# Altium PCB PCB.PcbDoc
Units mm, origin at the board's own origin, x right, y up, seen from the top; angles counter-clockwise.
Board outline 76.73 x 81.4 mm, 2 copper layers (Top Layer, Bottom Layer); 76 components, 50 nets, 285 pads, 249 vias.
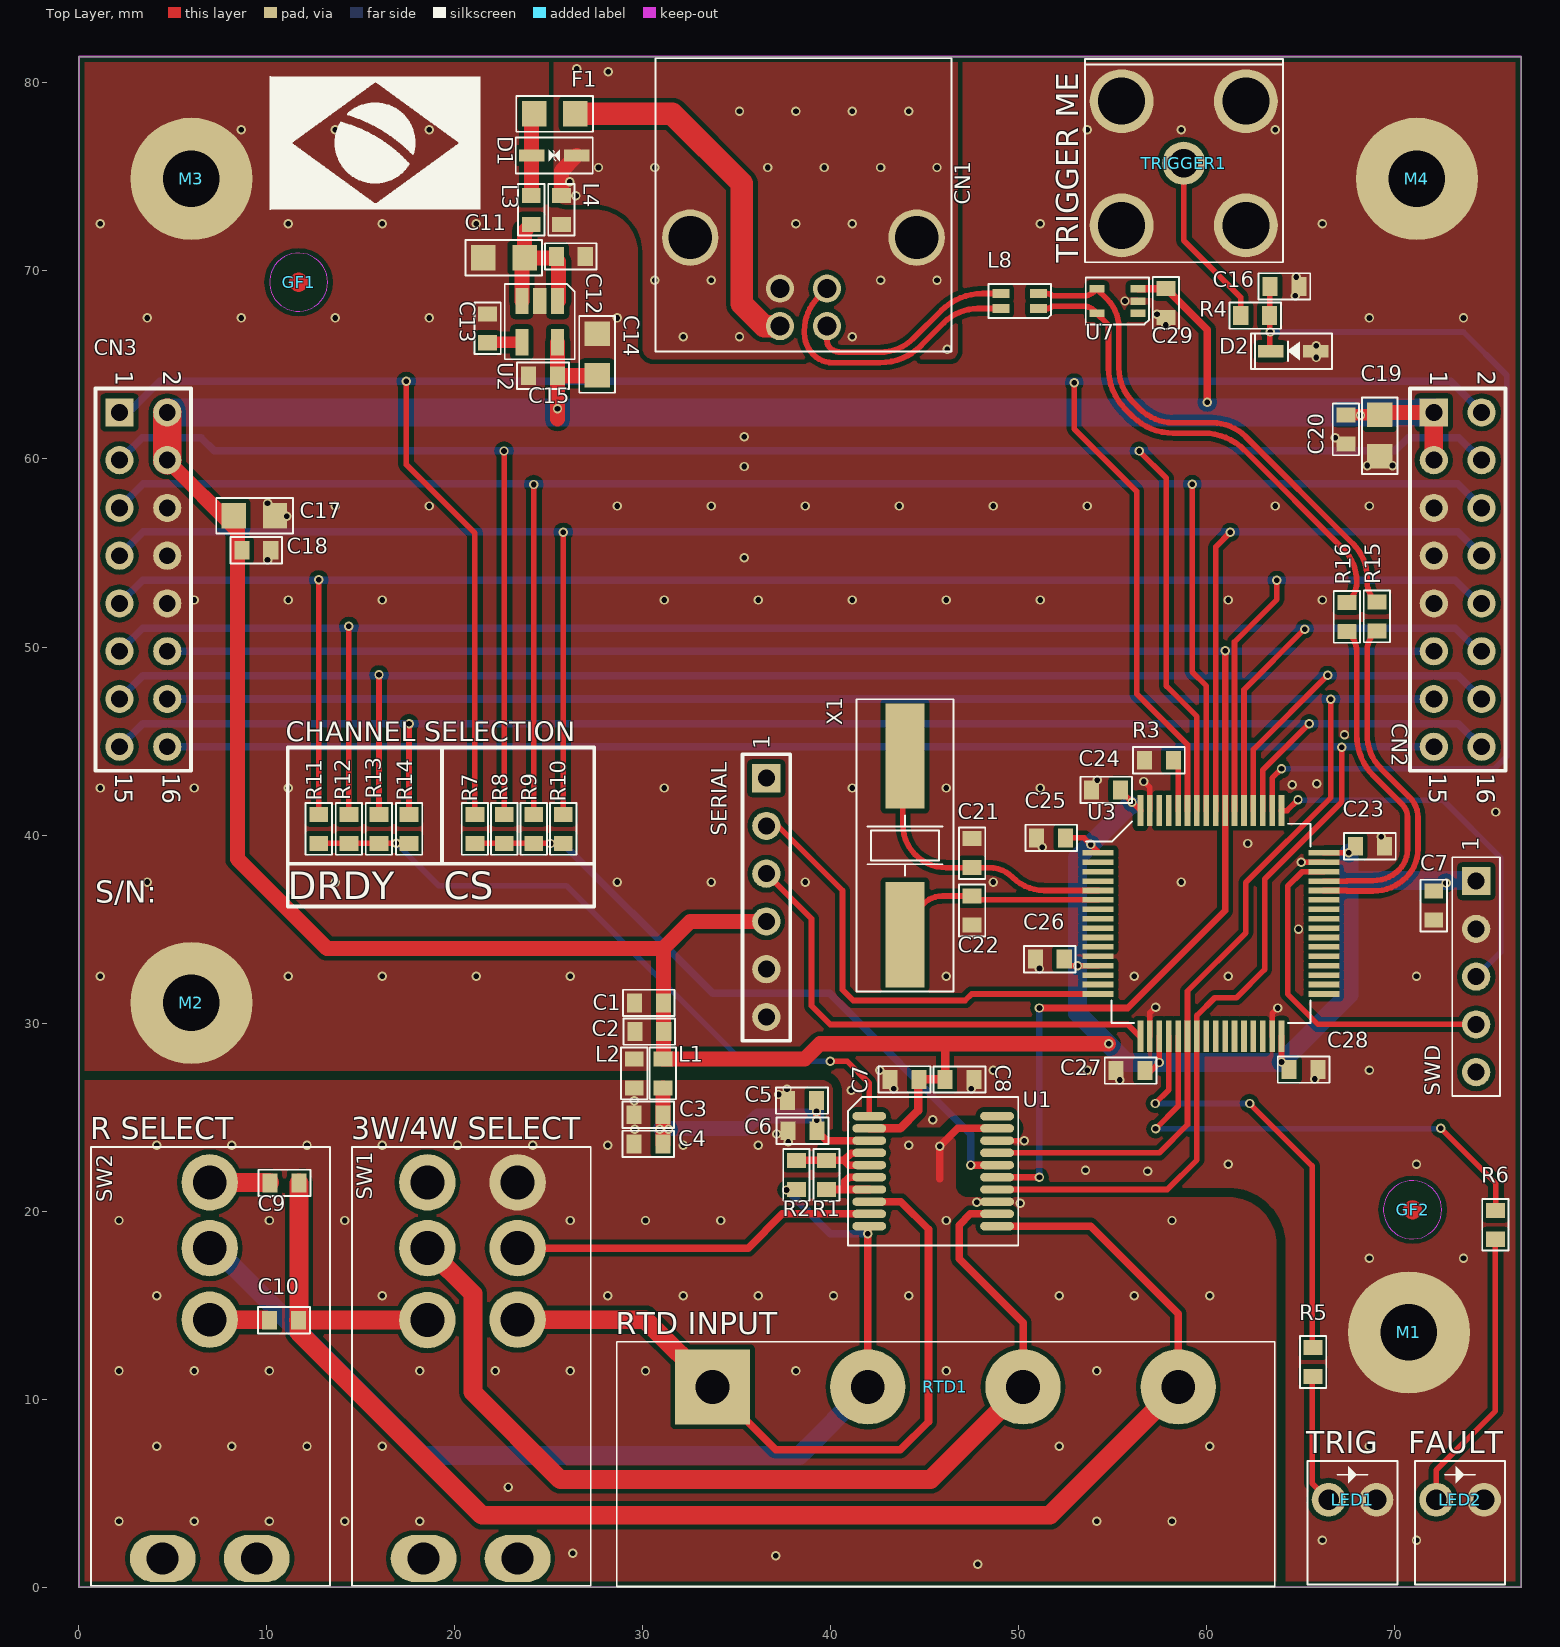
[diagram p0: Top Layer view]
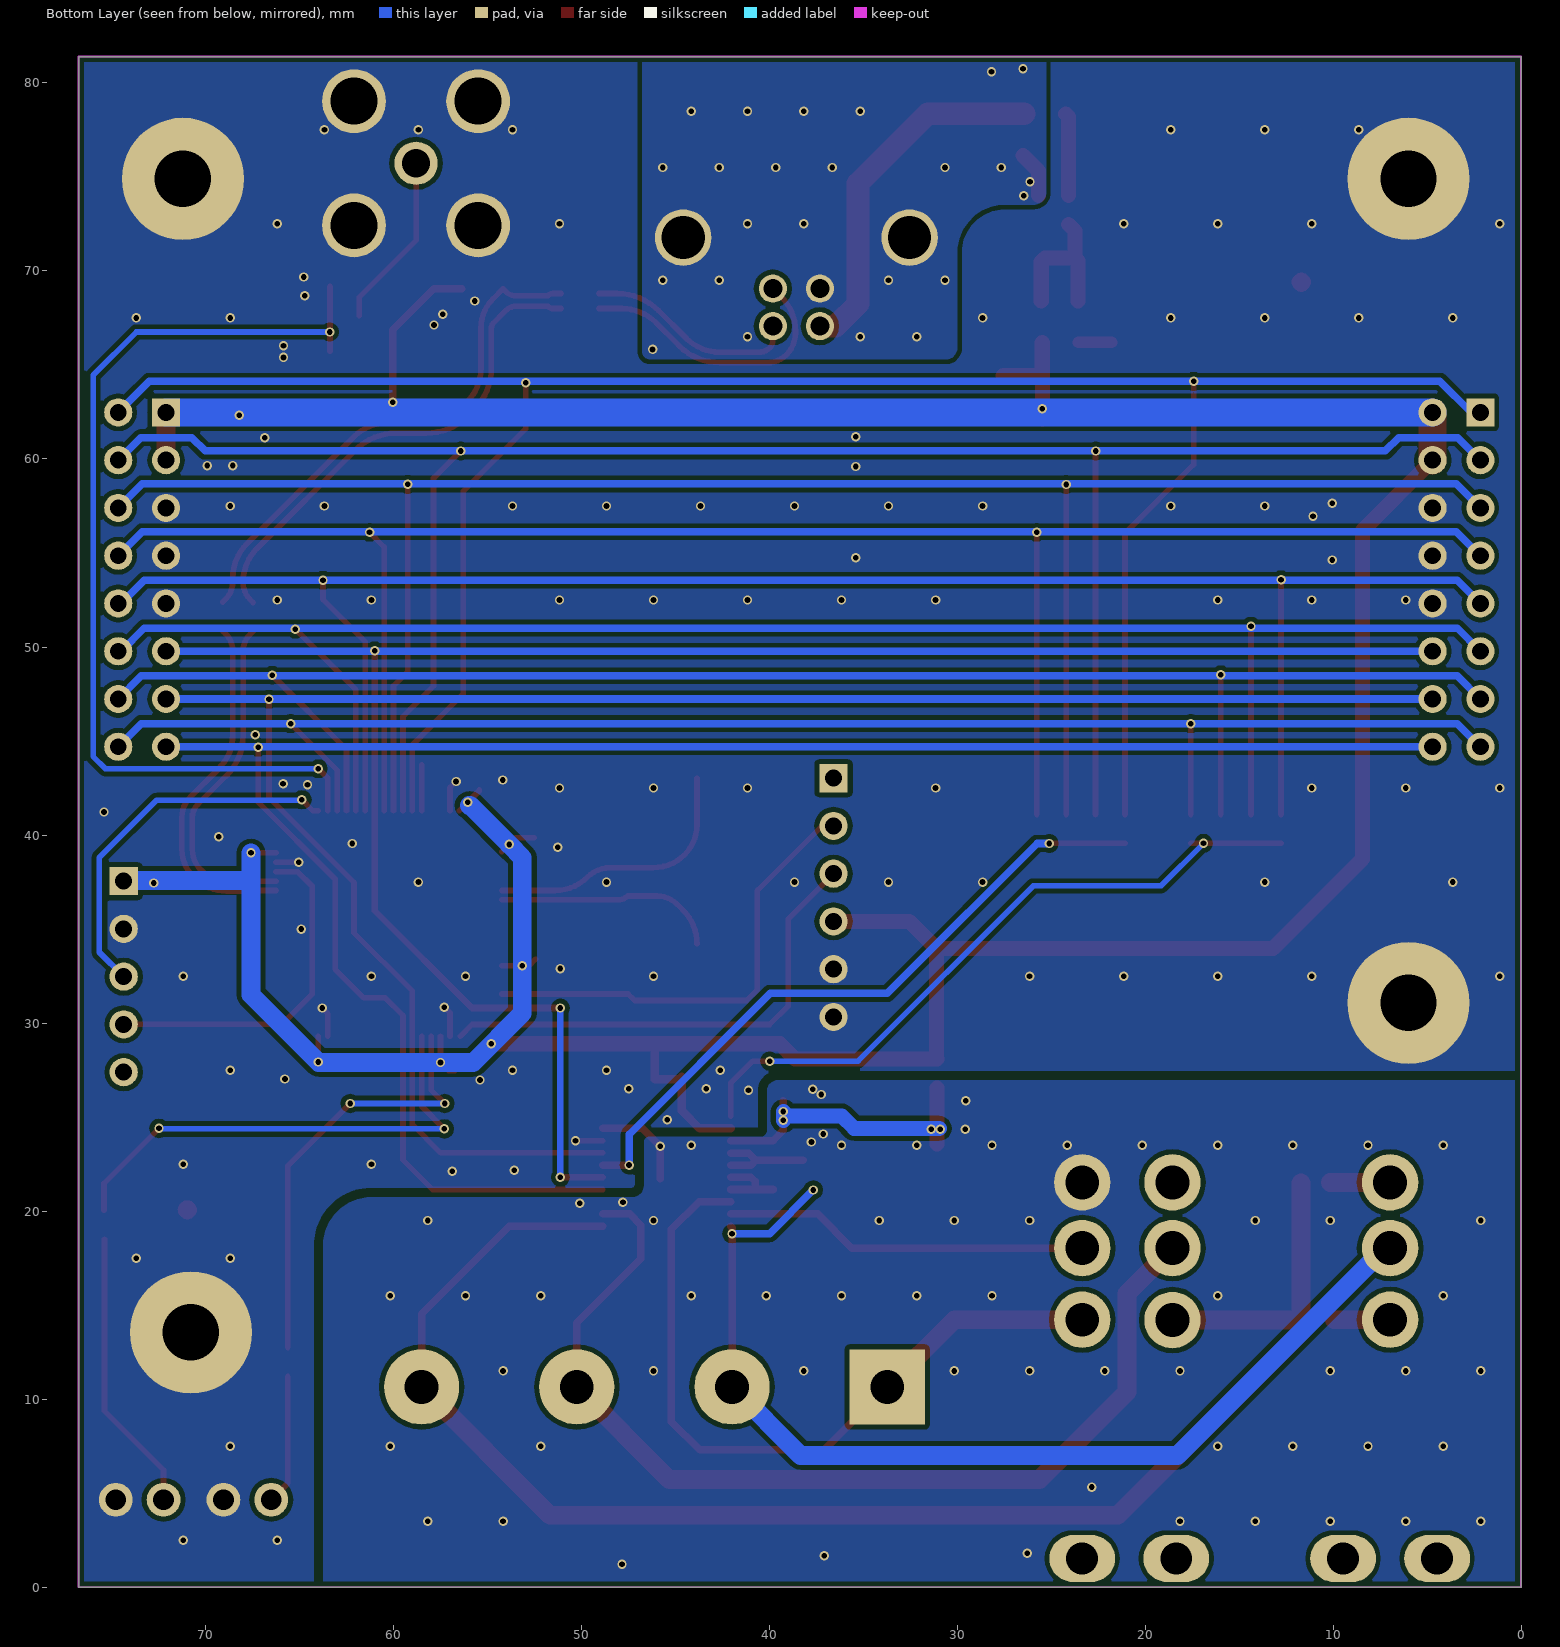
[diagram p1: Bottom Layer view, seen from below]
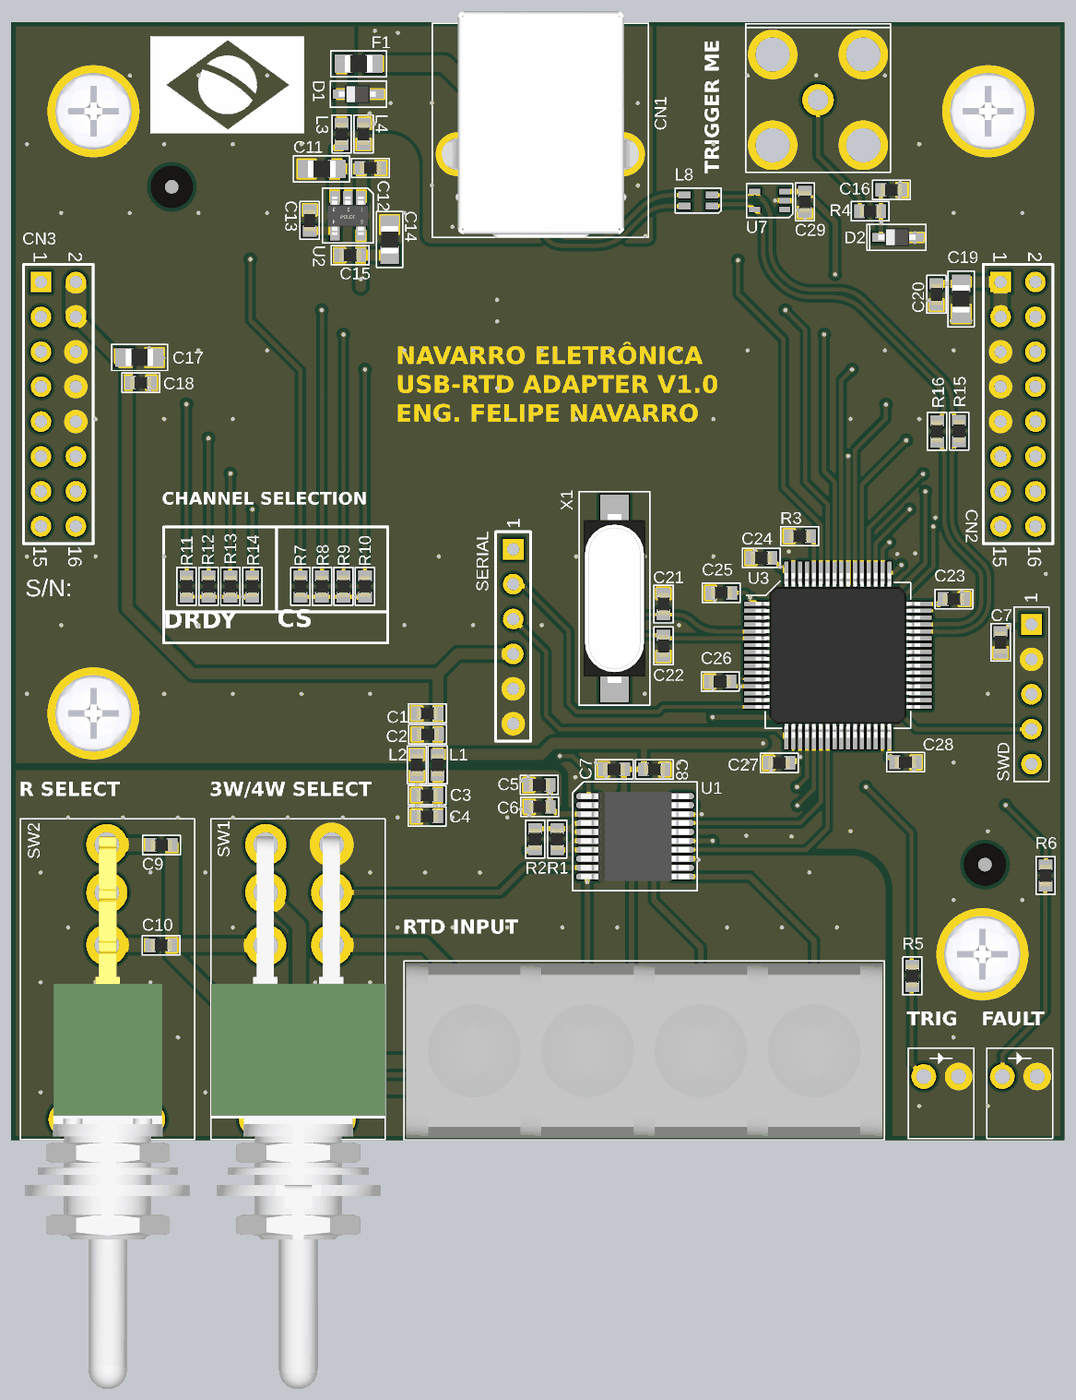
[diagram p2: 3D render of the assembled board from above, using the file's embedded part models]

## Layer stack, top to bottom
Top Solder: solder mask 0.0102, Solder Resist, Dk 3.5
Top Layer: signal copper 0.0356
Dielectric 1: dielectric 0.32, FR-4, Dk 4.8
Bottom Layer: signal copper 0.0356
Bottom Solder: solder mask 0.0102, Solder Resist, Dk 3.5

## Board outline
0,0 0,81.4 76.725,81.4 76.725,0

## Design rules (kind name [scope] priority, off if disabled: settings)
Clearance [InNet('GNDA') vs InNet('GND')] p1: gap=0.5 ignorepadtopadclearanceinfootprint=FALSE
Clearance Clearance_1 [All] p2: gap=0.254 ignorepadtopadclearanceinfootprint=FALSE except(0: Arc-Hole Track-Hole SMDPad-Hole THPad-Hole Via-Hole Fill-Hole Poly-Hole Region-Hole Text-Hole)
DiffPairsRouting [All] p1: maxlimit=0.254 minlimit=0.254 mostfreqgap=0.254 toplayer_minwidth=0.3 toplayer_maxwidth=0.381 toplayer_prefwidth=0.381 bottomlayer_minwidth=0.3 bottomlayer_maxwidth=0.381 bottomlayer_prefwidth=0.381 maxuncoupledlength=12.7
PolygonConnect [All] p1: connectstyle=Direct reliefconductorwidth=0.254 reliefentries=4 polygonreliefangle="90 Angle" airgapwidth=0.254
RoutingVias [All] p1: holewidth=0.711 width=1.27 viastyle="Through Hole" minholewidth=0.711 minwidth=1.27 maxholewidth=0.711 maxwidth=1.27
SolderMaskExpansion [All] p1: expansion=0.102
Width [All] p1: maxlimit=3 minlimit=0.254 preferedwidth=0.254
29 further rules are at their usual default settings.

## Classes and differential pairs
component class Block-Diagram: GF1 GF2 M1 M2 M3 M4
component class RTD-SPI: C1 C2 C3 C4 C5 C6 C7 C8 C9 C10 L1 L2 R1 R2 RTD1 SW1 SW2 U1
component class Microcontroller: C7 C11 C12 C13 C14 C15 C16 C17 C18 C19 C20 C21 C22 C23 C24 C25 C26 C27 C28 C29 CN1 CN2 CN3 D1 D2 F1 L3 L4 L8 LED1 LED2 R3 R4 R5 R6 R7 R8 R9 R10 R11 R12 R13 R14 R15 R16 SERIAL SWD TRIGGER1 U2 U3 U7 X1
differential pair DO: +DO_P -DO_N
differential pair DI: +DI_P -DI_N
differential pair D: +D_P -D_N

## Components (designator, comment, footprint, x,y, rotation, side; value= is the part's Value field where it differs from the comment)
C1 "Capacitor Cerâmico" CC0603 30.325,31.075 r0 top value=1uF
C2 "Capacitor Cerâmico" CC0603 30.35,29.55 r0 top value=100nF
C3 "Capacitor Cerâmico" CC0603 30.3,25.125 r0 top value=100nF
C4 "Capacitor Cerâmico" CC0603 30.3,23.575 r0 top value=1uF
C5 "Capacitor Cerâmico" CC0603 38.475,25.875 r0 top value=100nF
C6 "Capacitor Cerâmico" CC0603 38.5,24.275 r0 top value=1uF
C7 "Capacitor Cerâmico" CC0603 72.075,36.25 r90 top value=100nF
C7 "Capacitor Cerâmico" CC0603 43.925,27.005 r0 top value=100nF
C8 "Capacitor Cerâmico" CC0603 46.85,27 r180 top value=1uF
C9 "Capacitor Cerâmico" CC0603 10.95,21.5 r180 top value=10nF
C10 "Capacitor Cerâmico" CC0603 10.925,14.2 r180 top value=100nF
C11 "Capacitor Cerâmico" CC0805 22.625,70.7 r0 top value=10uF
C12 "Capacitor Cerâmico" CC0603 26.175,70.775 r180 top value=100nF
C13 "Capacitor Cerâmico" CC0603 21.75,66.95 r270 top value=10nF
C14 "Capacitor Cerâmico" CC0805 27.575,65.55 r270 top value=10uF
C15 "Capacitor Cerâmico" CC0603 24.7,64.425 r0 top value=100nF
C16 "Capacitor Cerâmico" CC0603 64.125,69.175 r180 top value=100pF
C17 "Capacitor Cerâmico" CC0805 9.345,56.98 r180 top value=10uF
C18 "Capacitor Cerâmico" CC0603 9.45,55.15 r180 top value=100nF
C19 "Capacitor Cerâmico" CC0805 69.2,61.25 r90 top value=10uF
C20 "Capacitor Cerâmico" CC0603 67.4,61.575 r90 top value=100nF
C21 "Capacitor Cerâmico" CC0603 47.52,39.036 r270 top value=36pF
C22 "Capacitor Cerâmico" CC0603 47.52,35.988 r90 top value=36pF
C23 "Capacitor Cerâmico" CC0603 68.675,39.4 r180 top value=100nF
C24 "Capacitor Cerâmico" CC0603 54.65,42.4 r0 top value=100nF
C25 "Capacitor Cerâmico" CC0603 51.725,39.85 r0 top value=100nF
C26 "Capacitor Cerâmico" CC0603 51.65,33.4 r0 top value=100nF
C27 "Capacitor Cerâmico" CC0603 55.95,27.475 r0 top value=100nF
C28 "Capacitor Cerâmico" CC0603 65.15,27.525 r180 top value=100nF
C29 "Capacitor Cerâmico" CC0603 57.825,68.3 r270 top value=470pF
CN1 "USB B" CONN_USB-B_RCPT-H 38.55,74.2 r180 top value=Receptáculo
CN2 "Header 8X2" "CONN HDR2X8" 72.075,62.475 r270 top
CN3 "Header 8X2" "CONN HDR2X8" 2.175,62.475 r270 top value="Barra dupla de pinos"
D1 "CDSOD323-T03SC" "SOD-323 BIDIRECT" 25.294,76.14 r180 top value=200pF@1MHz
D2 "MM3Z5V1T1G" "SOD-323 Diodo-K2" 64.6,65.725 r180 top value=Z=60R
F1 "Thermistor" CC0805 25.325,78.35 r0 top
GF1 "Fiducial" "FIDUCIAL 1mm" 11.7,69.4 r0 top
GF2 "Fiducial" "FIDUCIAL 1mm" 70.942,20.07 r0 top
L1 "Bead" CC0603 31.075,27.325 r270 top value=1K@100MHz
L2 "Bead" CC0603 29.55,27.325 r270 top value=1K@100MHz
L3 "Bead" CC0603 24.075,73.25 r270 top value=1K@100MHz
L4 "Bead" CC0603 25.675,73.25 r270 top value=1K@100MHz
L8 "ACM2012-900-2P" TR0805-4N 50.05,68.4 r180 top value=90R@100MHz
LED1 "LED" LED-INDIC 67.75,4.65 r0 top value=Verde
LED2 "LED" LED-INDIC 73.475,4.65 r0 top value=Verde
M1 "Furo de Fixação" Furo_M3 70.75,13.55 r0 top value=M3
M2 "Furo de Fixação" Furo_M3 6,31.075 r0 top value=M3
M3 "Furo de Fixação" Furo_M3 6,74.9 r0 top value=M3
M4 "Furo de Fixação" Furo_M3 71.175,74.9 r0 top value=M3
R1 "Resistor" CC0603 39.775,21.925 r90 top value=4K7
R2 "Resistor" CC0603 38.175,21.925 r90 top value=10M
R3 "Resistor" CC0603 57.45,43.975 r0 top value=10K
R4 "Resistor" CC0603 62.575,67.625 r180 top value=22R
R5 "Resistor" CC0603 65.65,11.975 r90 top value=470R
R6 "Resistor" CC0603 75.35,19.275 r90 top value=470R
R7 "Resistor" CC0603 21.075,40.325 r270 top value=0R
R8 "Resistor Open" CC0603 22.642,40.325 r270 top value=OPEN
R9 "Resistor Open" CC0603 24.208,40.325 r270 top value=OPEN
R10 "Resistor Open" CC0603 25.775,40.325 r270 top value=OPEN
R11 "Resistor" CC0603 12.775,40.325 r270 top value=0R
R12 "Resistor Open" CC0603 14.375,40.325 r270 top value=OPEN
R13 "Resistor Open" CC0603 15.975,40.325 r270 top value=OPEN
R14 "Resistor Open" CC0603 17.575,40.325 r270 top value=OPEN
R15 "Resistor" CC0603 69.05,51.625 r270 top value=22R
R16 "Resistor" CC0603 67.45,51.6 r270 top value=22R
RTD1 "Screw" "CONN BARRIER STRIP 4CIRC 0.325\"" 46.1,10.65 r0 top value="Strip Barrier 4 Pos"
SERIAL "Header 6" "CONN HDR1X6" 36.575,43.025 r270 top value="Barra de 40 pinos - ATENÇÃO"
SW1 "M2022SS1W40" "SWITCH TOGGLE DPDT 6A 125V" 20.85,11.525 r90 top value=ON-ON
SW2 "M2012SS1G40" "SWITCH TOGGLE SPDT 6A 125V" 6.975,11.525 r90 top value=On-On
SWD "Header 5" "CONN HDR1X5" 74.325,37.55 r270 top value="Barra de 40 pinos - ATENÇÃO"
TRIGGER1 "Conn BNC" "CONN BNC-JACK" 58.775,75.725 r0 top value="Jack BNC"
U1 "MAX31865" TSSOP-20N 45.45,22.125 r0 top
U2 "TPS79333DBVR" SOT-23-5N 24.525,67.3 r270 top
U3 "STM32F072RB" TQFP-64N 60.225,35.3 r0 top
U7 "SP3003-02JTG" SC70-5N 55.25,68.4 r180 top value=0.65pF
X1 "8Mhz" HC/49US 43.95,39.45 r270 top value=20pF/40R

## Footprints (in the part's own frame and the unit in brackets; to place one, negate y for a bottom-side part, rotate by r counter-clockwise, add the part's x,y. Pads: shape width x height; smd on the part's side, far side on the other; paste and mask are expansions set on the pad)
CC0603 [mm] "Chip Resistor, 2-Leads, Body 1,6x0,8mm, IPC Medium Density"
  rect 0.8x1 smd: 1(-0.77,0) 2(0.77,0)
  silkscreen extent -1.38,-0.7 1.37,0.7, body extent -0.8,-0.42 0.8,0.43, height 0.45
CC0805 [mm] "Chip Resistor, 2-Leads, Body 2,0x1,2mm, IPC Medium Density"
  rect 1.3x1.35 smd: 1(-1.1,0) 2(1.1,0)
  silkscreen extent -2.05,-0.95 2.03,0.95, body extent -1,-0.62 1,0.63, height 0.6
"CONN BARRIER STRIP 4CIRC 0.325\"" [mm] "4 Circuit 0.325\" (8.26mm) Barrier Block Connector, Screws"
  rect 4x4 hole 1.8: 1(-12.383,0)
  round 4 hole 1.8: 2(-4.128,0) 3(4.127,0) 4(12.382,0)
  silkscreen extent -17.48,-10.62 17.51,2.4, body extent -17.32,-10.48 17.36,2.22, height 13.46
"CONN BNC-JACK" [mm]
  round 2.3 hole 1.5: 1(0,0)
  round 3.4 hole 2.5: 2(-3.3,-3.3) 2(-3.3,3.3) 2(3.3,-3.3) 2(3.3,3.3)
  silkscreen extent -5.26,-5.26 5.28,5.55, body extent -5.16,-5.19 5.2,22.9, height 10.95
"CONN HDR1X5" [mm] "Connector; Header; 5 Position, Pitch 2.54mm"
  rect 1.5x1.5 hole 0.9: 1(0,0)
  round 1.5 hole 0.9: 2(2.54,0) 3(5.08,0) 4(7.62,0) 5(10.16,0)
  silkscreen extent -1.27,-1.27 11.43,1.27
"CONN HDR1X6" [mm] "Connector; Header; 6 Position"
  rect 1.5x1.5 hole 0.9: 1(0,0)
  round 1.5 hole 0.9: 2(2.54,0) 3(5.08,0) 4(7.62,0) 5(10.16,0) 6(12.7,0)
  silkscreen extent -1.27,-1.27 13.97,1.27
"CONN HDR2X8" [mm] "Connector; Header; 8x2 Position"
  rect 1.5x1.5 hole 0.9: 1(0,0)
  round 1.5 hole 0.9: 2(0,2.54) 3(2.54,0) 4(2.54,2.54) 5(5.08,0) 6(5.08,2.54) 7(7.62,0) 8(7.62,2.54) 9(10.16,0) 10(10.16,2.54) 11(12.7,0) 12(12.7,2.54) 13(15.24,0) 14(15.24,2.54) 15(17.78,0) 16(17.78,2.54)
  silkscreen extent -1.27,-1.27 19.05,3.81
CONN_USB-B_RCPT-H [mm] "Conector USB SMD tipo B, Macho"
  round 1.5 hole 1: 1(1.25,7.135) 2(-1.25,7.135) 3(-1.25,5.135) 4(1.25,5.135)
  round 3 hole 2.3: 5(6.02,2.425) 6(-6.02,2.425)
  silkscreen extent -7.87,-7.11 7.87,8.49, body extent -7.45,-7.96 7.35,8.54, height 11
"FIDUCIAL 1mm" [mm] "Guia fiducial sem uso de PAD"
  Top Layer region: 0,-0.5 -0.191,-0.462 -0.354,-0.354 -0.462,-0.191 -0.5,0 -0.5,0 -0.462,0.191 -0.354,0.354 -0.191,0.462 0,0.5 0,0.5 0.191,0.462 0.354,0.354 0.462,0.191 0.5,0 0.5,0 0.462,-0.191 0.354,-0.354 0.191,-0.462 0,-0.5
  Top Layer keep-out circle w0.01: c0,0 r1.55
Furo_M3 [mm] "Furo metalizado para parafuso M3"
  round 6.5 hole 3 paste+0: X(0,0)
  body extent -2.8,-2.8 2.8,2.8, height 2.38
HC/49US [mm] "Crystal, 2-Leads, Body 11,5x4,7mm, IPC Low Density"
  rect 5.6x2.1 smd: 1(-4.75,0) 2(4.75,0)
  silkscreen extent -7.77,-2.57 7.78,2.58, body extent -6.15,-2.25 6.15,2.25, height 5.18
LED-INDIC [mm]
  round 1.8 hole 1.1: 1(-1.27,0) 2(1.27,0)
  silkscreen extent -2.4,-4.51 2.38,2.07, body extent -2.3,-6.81 2.3,1.95, height 7.3
SC70-5N [mm] "SOT23, 5-Leads, Body 2,3x2,4mm (max), Pitch 0,65mm, IPC Medium Density"
  rect 0.8x0.4 smd: 1(-1.1,0.65) 2(-1.1,0) 3(-1.1,-0.65) 4(1.1,-0.65) 5(1.1,0.65)
  silkscreen extent -1.69,-1.24 1.69,1.25, body extent -0.67,-1.12 0.67,1.13, height 1.1
"SOD-323 BIDIRECT" [mm] "Molded TVS Diode, 2-Leads, Body 1,7x1,3mm, IPC Medium Density,"
  rect 1.35x0.65 smd: 1(-1.2,0) 2(1.2,0)
  silkscreen extent -2.05,-0.95 2.04,0.95, body extent -1.28,-0.68 1.42,0.67, height 0.79
"SOD-323 Diodo-K2" [mm] "Molded Diode, 2-Leads, Body 1,7x1,3mm, IPC Medium Density, Cathode on pin 2"
  rect 1.35x0.65 smd: 1(-1.2,0) 2(1.2,0)
  silkscreen extent -2.05,-0.95 2.25,0.95, body extent -1.28,-0.68 1.42,0.67, height 0.79
SOT-23-5N [mm] "SOT23, 5-Leads, Body 3,1x2,7mm (max), Pitch 0,95mm, IPC Medium Density"
  rect 1.4x0.7 smd: 1(-1.1,0.95) 2(-1.1,0) 3(-1.1,-0.95) 4(1.1,-0.95) 5(1.1,0.95)
  silkscreen extent -2.01,-1.86 2,1.86, body extent -1.4,-1.45 1.4,1.45, height 1.09
"SWITCH TOGGLE DPDT 6A 125V" [mm] "Chave Seletora SPDT para SubPanel com angulo lateral. Thru-Hole"
  round 3 hole 1.8: 1(2.7,-2.5) 2(6.51,-2.5) 3(10,-2.5) 4(2.681,2.3) 5(6.51,2.3) 6(10,2.3)
  oval 2.5x3.5 hole 1.7: 7(-10,-2.5) 7(-10,2.5)
  silkscreen extent -11.45,-6.39 11.88,6.31, body extent -29.62,-6.42 10.58,6.28, height 13.5
"SWITCH TOGGLE SPDT 6A 125V" [mm] "Chave Seletora SPDT para SubPanel com angulo lateral. Thru-Hole"
  round 3 hole 1.8: 1(2.7,0) 2(6.51,0) 3(10,0)
  oval 2.5x3.5 hole 1.7: 7(-10,-2.5) 7(-10,2.5)
  silkscreen extent -11.45,-6.39 11.88,6.31, body extent -29.61,-6.06 10.58,5.93, height 2.89
TQFP-64N [mm] "TQFP, 64-Leads, Body 12,0x12,0mm (max), Pitch 0,50mm, IPC Medium Density"
  rect 1.65x0.3 smd: 1(-6,3.75) 2(-6,3.25) 3(-6,2.75) 4(-6,2.25) 5(-6,1.75) 6(-6,1.25) 7(-6,0.75) 8(-6,0.25) 9(-6,-0.25) 10(-6,-0.75) 11(-6,-1.25) 12(-6,-1.75) 13(-6,-2.25) 14(-6,-2.75) 15(-6,-3.25) 16(-6,-3.75) 33(6,-3.75) 34(6,-3.25) 35(6,-2.75) 36(6,-2.25) 37(6,-1.75) 38(6,-1.25) 39(6,-0.75) 40(6,-0.25) 41(6,0.25) 42(6,0.75) 43(6,1.25) 44(6,1.75) 45(6,2.25) 46(6,2.75) 47(6,3.25) 48(6,3.75)
  rect 0.3x1.65 smd: 17(-3.75,-6) 18(-3.25,-6) 19(-2.75,-6) 20(-2.25,-6) 21(-1.75,-6) 22(-1.25,-6) 23(-0.75,-6) 24(-0.25,-6) 25(0.25,-6) 26(0.75,-6) 27(1.25,-6) 28(1.75,-6) 29(2.25,-6) 30(2.75,-6) 31(3.25,-6) 32(3.75,-6) 49(3.75,6) 50(3.25,6) 51(2.75,6) 52(2.25,6) 53(1.75,6) 54(1.25,6) 55(0.75,6) 56(0.25,6) 57(-0.25,6) 58(-0.75,6) 59(-1.25,6) 60(-1.75,6) 61(-2.25,6) 62(-2.75,6) 63(-3.25,6) 64(-3.75,6)
  silkscreen extent -6.65,-5.3 5.3,5.41, body extent -6,-6 6,6, height 1.2
TR0805-4N [mm] "Precision Wire Wound Inductor, 4-Leads, Body 2,0x1,2mm, IPC High Density"
  rect 0.9x0.5 smd: 1(-1,0.4) 2(-1,-0.4) 3(1,-0.4) 4(1,0.4)
  silkscreen extent -1.67,-0.9 1.67,0.9, body extent -1.1,-0.7 1.1,0.7, height 1.3
TSSOP-20N [mm] "TSOP, 20-Leads, Body 7,5x5,6mm (max), Pitch 0,65mm, IPC High Density"
  oval 1.8x0.45 smd: 1(-3.4,2.925) 2(-3.4,2.275) 3(-3.4,1.625) 4(-3.4,0.975) 5(-3.4,0.325) 6(-3.4,-0.325) 7(-3.4,-0.975) 8(-3.4,-1.625) 9(-3.4,-2.275) 10(-3.4,-2.925) 11(3.4,-2.925) 12(3.4,-2.275) 13(3.4,-1.625) 14(3.4,-0.975) 15(3.4,-0.325) 16(3.4,0.325) 17(3.4,0.975) 18(3.4,1.625) 19(3.4,2.275) 20(3.4,2.925)
  silkscreen extent -4.54,-3.96 4.52,3.95, body extent -3.95,-3.25 3.95,3.25, height 1.88

## Part data
C1 C4 C6 C8: library part "Cap 1uF 50V 0603 X5R", "Capacitor (Semiconductor SIM Model)", Supplier Part Number 1=587-2400-1-ND, Tolerância=±10%, ChinesePrice=0,01100, Chinês=Local, ComponentLink1Description=Datasheet, ComponentLink1URL=D:\Tecnoclade\Datasheet\!DataMissing.pdf, Corrente=*A, Obs=X5R, Potência=*W, Supplier 1=Digi-Key, Tensão=50V
C2 C3 C5 C7 C7 C10 C12 C15 C18 C20 C23 C24 C25 C26 C27 C28: library part "Cap 100nF 50V 0603 X7R", "Capacitor (Semiconductor SIM Model)", Supplier Part Number 1=1276-1000-1-ND, Tolerância=±10%, ComponentLink1Description=Datasheet, ComponentLink1URL=D:\Tecnoclade\Datasheet\!DataMissing.pdf, Corrente=*A, Obs=X7R, Potência=*W, Supplier 1=Digi-Key, Tensão=50V
  C2 C3 C5 C7 C10 C12 C15: ChinesePrice=0,00250, Chinês=Local
  C7 C18 C20 C23 C24 C25 C26 C27 C28: ChinesePrice=0,00000, Chinês=-----
C9 C13: library part "Cap 10nF 50V 0603 X7R 5%", "Capacitor (Semiconductor SIM Model)", Supplier Part Number 1=399-1092-1-ND, Tolerância=±5%, ChinesePrice=0,00320, Chinês=Local, ComponentLink1Description=Datasheet, ComponentLink1URL=D:\Tecnoclade\Datasheet\!DataMissing.pdf, Corrente=*A, Obs=X7R, Potência=*W, Supplier 1=Digi-Key, Tensão=50V
C11 C14: library part "Cap 10uF 25V 0805 X5R", "Capacitor (Semiconductor SIM Model)", Supplier Part Number 1=587-2985-1-ND, Tolerância=±10%, ChinesePrice=0,02620, Chinês=Local, ComponentLink1Description=Datasheet, ComponentLink1URL=D:\Tecnoclade\Datasheet\!DataMissing.pdf, Corrente=*A, Obs=X5R, Potência=*W, Supplier 1=Digi-Key, Tensão=25V
C16: library part "Cap 100pF 100V 0603 NP0", "Capacitor (Semiconductor SIM Model)", Supplier Part Number 1=1276-1295-1-ND, Tolerância=±5%, ChinesePrice=0,00000, Chinês=-----, ComponentLink1Description=Datasheet, ComponentLink1URL=D:\Tecnoclade\Datasheet\!DataMissing.pdf, Corrente=*A, Obs=NP0, Potência=*W, Supplier 1=Digi-Key, Tensão=100V
C17 C19: library part "Cap 10uF 6V3 0805 Y5V", "Capacitor (Semiconductor SIM Model)", Supplier Part Number 1=587-1314-1-ND, Tolerância="-20%, +80%", ChinesePrice=0,01200, Chinês=Local, ComponentLink1Description=Datasheet, ComponentLink1URL=D:\Tecnoclade\Datasheet\!DataMissing.pdf, Corrente=*A, Obs=Y5V, Potência=*W, Supplier 1=Digi-Key, Tensão=6V3
C21 C22: library part "Cap - $Val $V $Footprint $Classe_1", "Capacitor (Semiconductor SIM Model)", Supplier Part Number 1=1276-1187-1-ND, Tolerância=±*%, ChinesePrice=0,00000, Chinês=----, ComponentLink1Description=Datasheet, ComponentLink1URL=D:\Tecnoclade\Datasheet\!DataMissing.pdf, Corrente=*A, Potência=*W, Supplier 1=Digi-Key, Tensão=50v
C29: library part "Cap 470pF 50V 0603 X7R", "Capacitor (Semiconductor SIM Model)", Supplier Part Number 1=399-1075-1-ND, Tolerância=±10%, ChinesePrice=0,00180, Chinês=Local, ComponentLink1Description=Datasheet, ComponentLink1URL=D:\Tecnoclade\Datasheet\!DataMissing.pdf, Corrente=*A, Obs=X7R, Potência=*W, Supplier 1=Digi-Key, Tensão=50V
CN1: library part "USB B RCPT-H", "Conector Jack USB B, Through Hole, Right Angle, Horizontal", Supplier Part Number 1=A31725-ND, ChinesePrice=0,00000, Chinês=----, ComponentLink1Description=Datasheet, ComponentLink1URL=D:\Tecnoclade\Datasheet\!DataMissing.pdf, Obs="USB 2.0", Supplier 1=Digi-Key
CN2: "Header, 8-Pin, Dual row", Supplier Part Number 1=609-3337-ND, ChinesePrice=0,10000, Chinês=----, ComponentLink1Description=Datasheet, ComponentLink1URL=D:\Tecnoclade\Datasheet\!DataMissing.pdf, Supplier 1=Digi-Key
CN3: "Header, 8-Pin, Dual row", Supplier Part Number 1=PPPC082LJBN-RC, ChinesePrice=0,10000, Chinês=----, ComponentLink1Description=Datasheet, ComponentLink1URL=D:\Tecnoclade\Datasheet\!DataMissing.pdf, Supplier 1=Digi-Key
D1: library part "TVS 8V 5% SOD323 BI 400W", "Transient Voltage Supressor diode", Supplier Part Number 1=CDSOD323-T03SCCT-ND, Tolerância=±*%, ChinesePrice=0,00000, Chinês=----, ComponentLink1Description=Datasheet, ComponentLink1URL=D:\Tecnoclade\Datasheet\!DataMissing.pdf, Corrente=43A, Obs=Bidirecional, Potência=400W, Supplier 1=Digi-Key, Tensão=8V
D2: library part "DZ 5V1 200mW SOD-323", "Zener Diode", Supplier Part Number 1=MM3Z5V1T1GOSCT-ND, Tolerância=±6%, ChinesePrice=0,00000, Chinês=----, ComponentLink1Description=Datasheet, ComponentLink1URL=D:\Tecnoclade\Datasheet\!DataMissing.pdf, Obs="900mV @ 10mA", Potência=200mW, Supplier 1=Digi-Key, Tensão=5V1
F1: library part "Res Varistor", "Varistor (Voltage-Sensitive Resistor)", Supplier Part Number 1=507-1810-1-ND, ChinesePrice=0,09500, Chinês=Local, ComponentLink1Description=Datasheet, ComponentLink1URL=D:\Tecnoclade\Datasheet\!DataMissing.pdf, Corrente=100mA, Obs="TRIP: 300mA", Supplier 1=Digi-Key, Tensão=15V
GF1 GF2: "Guia Fiducial", Supplier Part Number 1=--Del, ChinesePrice=0,00000, Chinês=----, ComponentLink1Description=Datasheet, ComponentLink1URL=D:\Tecnoclade\Datasheet\, Supplier 1=Digi-Key
L1 L2 L3 L4: library part "Bd 1K@100MHz 0603 400mA", Supplier Part Number 1=445-1550-1-ND, Tolerância=±25%, ChinesePrice=0,00000, Chinês=-----, ComponentLink1Description=Datasheet, ComponentLink1URL=D:\Tecnoclade\Datasheet\!DataMissing.pdf, Corrente=400mA, Obs="Ferrite (0R5)", Substituição=27/06/2014, Supplier 1=Digi-Key
L8: "Indutor de Modo Comum", Supplier Part Number 1=445-2207-1-ND, Tolerância=±*%, ChinesePrice=0,19100, Chinês=Local, ComponentLink1Description=Datasheet, ComponentLink1URL=D:\Tecnoclade\Datasheet\!DataMissing.pdf, Corrente=400mA, Obs=Z=0R19, Potência=*W, Substituição=00/00/0000, Supplier 1=Digi-Key, Tensão=*V
LED1 LED2: library part LED2, "Typical RED, GREEN, YELLOW, AMBER GaAs LED", Supplier Part Number 1=754-1297-ND, ChinesePrice=0,00000, Chinês=----, Supplier 1=Digi-Key, VertSimCode="} XXXXX {"
M1 M2 M3 M4: library part Parafuso, "Furo para parafuso", Supplier Part Number 1=--Del, ChinesePrice=0,00000, Chinês=----, ComponentLink1Description=Datasheet, ComponentLink1URL=D:\Tecnoclade\Datasheet\!DataMissing.pdf, Supplier 1=Digi-Key
R1: library part "Res 4K7 1% 0603 1/10W", Supplier Part Number 1=RMCF0603FT4K70CT-ND, Tolerância=±1%, ChinesePrice=0,00000, Chinês=----, ComponentLink1Description=Datasheet, ComponentLink1URL=D:\Tecnoclade\Datasheet\!DataMissing.pdf, Corrente=*A, Obs=±100ppm/ºC, Potência=1/10W, Supplier 1=Digi-Key, Tensão=*V
R2: library part "Res 10M 1% 0603 1/10W", Supplier Part Number 1=311-10.0MHRCT-ND, Tolerância=1*%, ChinesePrice=0,00000, Chinês=----, ComponentLink1Description=Datasheet, ComponentLink1URL=D:\Tecnoclade\Datasheet\!DataMissing.pdf, Corrente=*A, Potência=1/10W, Supplier 1=Digi-Key, Tensão=*V
R3: library part "Res 10K 1% 0603 1/10W", Supplier Part Number 1=P10.0KHCT-ND, Tolerância=±1%, ChinesePrice=0,00089, Chinês=Local, ComponentLink1Description=Datasheet, ComponentLink1URL=D:\Tecnoclade\Datasheet\!DataMissing.pdf, Corrente=*A, Potência=1/10W, Supplier 1=Digi-Key, Tensão=*V
R4 R15 R16: library part "Res 22R 1% 0603 1/10W", Supplier Part Number 1=RMCF0603FT22R0CT-ND, Tolerância=±1%, ChinesePrice=0,00000, Chinês=----, ComponentLink1Description=Datasheet, ComponentLink1URL=D:\Tecnoclade\Datasheet\!DataMissing.pdf, Corrente=*A, Obs=±100ppm/ºC, Potência=1/10W, Supplier 1=Digi-Key, Tensão=*V
R5 R6: library part "Res 470R 5% 0603 1/10W", Supplier Part Number 1=RMCF0603JT470RCT-ND, Tolerância=±5%, ChinesePrice=0,00000, Chinês=----, ComponentLink1Description=Datasheet, ComponentLink1URL=D:\Tecnoclade\Datasheet\!DataMissing.pdf, Corrente=*A, Obs=±200ppm/ºC, Potência=1/10W, Supplier 1=Digi-Key, Tensão=*V
R7 R11: library part "Res 0R 0603 1/10W", Supplier Part Number 1=P0.0GCT-ND, Tolerância=Jumper, ChinesePrice=0,00089, Chinês=Local, ComponentLink1Description=Datasheet, ComponentLink1URL=D:\Tecnoclade\Datasheet\!DataMissing.pdf, Corrente=*A, Potência=1/10W, Supplier 1=Digi-Key, Tensão=*V
R8 R9 R10 R12 R13 R14: library part "Res Open 0603", "Resistor", Supplier Part Number 1=--Del, Tolerância=±*%, ChinesePrice=0,00000, Chinês=----, ComponentLink1Description=Datasheet, ComponentLink1URL=D:\Tecnoclade\Datasheet\!DataMissing.pdf, Corrente=*A, Potência=*W, Supplier 1=Digi-Key, Tensão=*V
RTD1: library part "Screw-4 125V 6A P2.54mm", "Conector Screw Block", Supplier Part Number 1=1-1437667-0-ND, Tolerância="20-30 AWG", ChinesePrice=0,00000, Chinês=----, ComponentLink1Description=Datasheet, Corrente=6A, Obs="Through Hole, M1.6", Supplier 1=Digi-Key, Tensão=125V
SERIAL: "Header, 6-Pin", Supplier Part Number 1=A26509-40-ND, ChinesePrice=0,10000, Chinês="Proved - Local", ComponentLink1Description=Datasheet, ComponentLink1URL=D:\Tecnoclade\Datasheet\!DataMissing.pdf, Supplier 1=Digi-Key
SW1: library part SW-DPDT, "Double-Pole, Double-Throw Switch", Supplier Part Number 1=M2022SS1W40-ND, ChinesePrice=1,64000, Chinês=Local, ComponentLink1Description=Datasheet, ComponentLink1URL=D:\Tecnoclade\Datasheet\, Corrente=6A, Supplier 1=Digi-Key, Tensão=125V
SW2: library part SW-SPDT, Supplier Part Number 1=M2012SS1G40-ND, ChinesePrice=0,00000, Chinês=-----, ComponentLink1Description=Datasheet, ComponentLink1URL=D:\Tecnoclade\Datasheet\, Corrente=3A, Obs=M2012SS1G40, Supplier 1=Digi-Key, Tensão=120V
SWD: "Header, 5-Pin", Supplier Part Number 1=A26509-40-ND, ChinesePrice=0,10000, Chinês="Proved - Local", ComponentLink1Description=Datasheet, ComponentLink1URL=D:\Tecnoclade\Datasheet\!DataMissing.pdf, Supplier 1=Digi-Key
TRIGGER1: "Conector BNC", Supplier Part Number 1=A97569-ND, ChinesePrice=0,00000, Chinês=----, ComponentLink1Description=Datasheet, ComponentLink1URL=D:\Tecnoclade\Datasheet\!DataMissing.pdf, Supplier 1=Digi-Key
U1: "RTD-to-Digital Converter", ChinesePrice=0,00000, Chinês=----, ComponentLink1Description=Datasheet, ComponentLink1URL=D:\Tecnoclade\Datasheet\, Supplier 1=Digi-Key
U2: library part TPS79333, "ULTRALOW-NOISE, HIGH PSRR, FAST RF 200mA LOW-DROPOUT LINEAR  REGULATORS I", Supplier Part Number 1=296-12961-1-ND, ChinesePrice=0,00000, Chinês=----, ComponentLink1Description=Datasheet, ComponentLink1URL=D:\Tecnoclade\Datasheet\, Corrente=200mA, Supplier 1=Digi-Key, Tensão=3V3
U3: "ARM Cortex M3", Supplier Part Number 1=497-14644-ND, ChinesePrice=0,00000, Chinês=----, ComponentLink1Description=Datasheet, ComponentLink1URL=D:\Tecnoclade\Datasheet\, Supplier 1=Digi-Key
U7: "TVS DIODE ARRAY", Supplier Part Number 1=F3301CT-ND, Supplier 1=Digi-Key, Tensão=6V
X1: library part XTAL, "Crystal Oscillator", Supplier Part Number 1=535-10212-1-ND, ChinesePrice=0,00000, Chinês=----, Supplier 1=Digi-Key

## Via types
v1: diameter 0.5, hole 0.3, Top Layer to Bottom Layer, tented both sides, 249 vias

## Nets (pads, with @x,y where several pads share a name; then routed paths per layer and width w, separated by ;. In a path a pad name is that pad's centre, name@x,y a point inside that pad or via, vN(x,y) a via of type N, cw(c..) or ccw(c..) an arc to the next point about the centre after c; other vN are vias at no path point)
3V3: C1.2 C2.2 C7.2 C8.2 C14.2 C15.2 C17.2 C18.2 C19.2 C20.2 C23.2 C24.2 C25.2 C26.2 C27.2 C28.2 C29.1 CN2.1 CN2.3 CN3.2 CN3.4 L1.1 SERIAL.4 SWD.1 U1.2 U2.5 U3.1 U3.13 U3.19 U3.32 U3.48 U3.64 U7.3 | length 236.6
  Top Layer w0.3: C26.2 52.77,33.05 U3.13 ; C25.2 53.479,39.85 v1(53.829,39.5) U3.1@54.225,39.104 ; C24.2 55.42,42.355 U3.64 ; C27.2 57.045,27.475 v1@57.421,27.851 ; v1(57.475,27.905) U3.19 ; v1(63.975,27.93) U3.32 ; U3.48 v1(67.555,39.05)
  Top Layer w0.4: U7.3 57.847,69.05 60.025,66.872 v1(60.025,63.025)
  Top Layer w0.45: U1.2 43.7,24.4 44.645,25.345 C7.2@44.645,27.15 ; C7.2@44.695,27.005 C8.2@46.075,27.005 ; C8.2 46.08,28.845
  Top Layer w0.6: C20.2 C19.2@69.195,62.345
  Top Layer w0.8: CN3.4 8.45,56.2 8.45,38.725 13.205,33.97 31.095,33.97 ; 25.47,62.13 C15.2 C15.2@25.475,64.425 ; U2.5 C15.2@25.475,64.425 ; C14.2@27.55,64.425 C15.2@25.475,64.425 ; L1.1 38.62,28.095 39.425,28.9 v1(54.779,28.9) ; L1.1@31.095,28.115 C1.2 31.095,33.97 ; SERIAL.4 32.53,35.405 31.095,33.97 ; C19.2@69.725,62.475 CN2.1
  Top Layer w1: CN2.3 CN2.1
  Top Layer w1.5: CN3.4 CN3.2
  Bottom Layer w1: v1@55.95,41.575 55.904,41.575 v1(53.829,39.5) 53.125,38.796 53.125,30.525 55.745,27.905 v1(57.475,27.905) 63.95,27.905 v1(63.975,27.93) 67.555,31.51 v1(67.555,39.05) ; 67.555,37.575 SWD.1@74.325,37.575
  Bottom Layer w1.5: CN3.2 CN2.1
  other v1: 53.125,33.05 72.725,37.45 56.025,41.75 68.175,62.325 25.47,62.675
3V3A: C3.2 C4.2 C5.2 C6.2 L1.2 U1.3 | length 16.7
  Top Layer w0.4: C6.2@39.245,24.3 v1(39.245,25.3) C5.2 ; C6.2 39.795,23.75 U1.3
  Top Layer w0.8: C4.2 31.075,23.58 L1.2
  Bottom Layer w0.8: v1@30.954,24.404 35.479,24.404 36.137,25.063 39.013,25.063 39.245,25.295 v1@39.245,24.83
  other v1: 30.9,24.35 31.375,24.35 39.25,24.825
AQC_LED: R5.2 U3.20 | length 23.2
  Top Layer w0.3: v1(57.25,25.725) 57.975,26.45 U3.20 ; v1(62.275,25.725) 65.6,22.4 R5.2@65.6,12.745
  Bottom Layer w0.3: v1@57.275,25.7 57.3,25.725 v1(62.275,25.725)
CS: R7.2 R8.2 R9.2 R10.2 U1.16 | length 36.6
  Top Layer w0.3: R7.2 R10.2
  Top Layer w0.4: v1(47.45,22.45) U1.16
  Bottom Layer w0.4: v1(25.1,39.55) 25.75,39.55 33.025,32.275 ; 32.975,32.325 33.725,31.575 39.95,31.575 47.45,24.075 v1(47.45,22.45)
CS1: CN2.2 CN3.1 R7.1 U3.59 | length 123.6
  Top Layer w0.3: v1(17.425,64.125) 17.425,59.7 21.075,56.05 R7.1 ; v1(52.95,64.05) 52.95,61.6 56.275,58.275 56.275,47.5 58.975,44.8 U3.59
  Bottom Layer w0.4: CN3.1 2.675,62.475 4.325,64.125 v1(17.425,64.125) 72.965,64.125 CN2.2
CS2: CN2.4 CN3.3 R8.1 U3.58 | length 113.8
  Top Layer w0.3: R8.1 v1@22.642,60.45 ; v1(56.4,60.425) 57.85,58.975 57.85,47.925 59.475,46.3 U3.58
  Bottom Layer w0.4: CN3.3 3.379,61.139 6.511,61.139 7.225,60.425 v1(22.625,60.425) 70,60.425 70.714,61.139 73.411,61.139 CN2.4
CS3: CN2.6 CN3.5 R9.1 U3.57 | length 108.7
  Top Layer w0.3: R9.1 v1(24.208,58.642) ; v1(59.225,58.65) 59.225,48.675 59.975,47.925 U3.57
  Bottom Layer w0.4: CN3.5 3.45,58.67 73.34,58.67 CN2.6
CS4: CN2.8 CN3.7 R10.1 U3.56 | length 103.6
  Top Layer w0.3: R10.1 v1(25.775,56.1) ; U3.56 60.475,55.325 v1(61.25,56.1)
  Bottom Layer w0.4: CN3.7 3.45,56.13 73.34,56.13 CN2.8
D_N: R15.2 U3.44 | length 19
  Top Layer w0.3: U3.44 67.405,37.05 cw(c67.405,36.951) 67.475,37.021 68.837,37.021 ccw(c68.837,39.538) 70.617,37.758 ccw(c69.139,39.236) 71.229,39.236 71.229,40.95 ccw(c69.73,40.95) 70.79,42.01 69.271,43.529 cw(c71.067,45.325) 68.527,45.325 68.527,49.805 cw(c69.8,49.805) 68.9,50.705 R15.2
D_P: R16.2 U3.45 | length 18.1
  Top Layer w0.3: U3.45 67.415,37.55 ccw(c67.415,37.635) 67.475,37.575 68.837,37.575 ccw(c68.837,39.538) 70.225,38.15 ccw(c69.139,39.236) 70.675,39.236 70.675,40.95 ccw(c69.73,40.95) 70.398,41.618 68.879,43.137 cw(c71.067,45.325) 67.973,45.325 67.973,49.779 ccw(c66.699,49.779) 67.6,50.68 R16.2
DI_N: CN1.2 L8.3 | length 10.6
  Top Layer w0.3: 39.8,66.287 ccw(c40.312,66.287) 39.95,65.925 ccw(c40.554,66.529) 40.554,65.675 42.614,65.675 ccw(c42.614,68.215) 44.41,66.419 45.885,67.894 cw(c48.073,65.706) 48.073,68.8 L8.3
DI_P: CN1.3 L8.4 | length 14.4
  Top Layer w0.3: CN1.3@39.344,68.609 ccw(c41.14,66.813) 38.6,66.813 38.6,66.695 ccw(c40.219,66.695) 39.074,65.551 ccw(c40.112,66.589) 40.112,65.121 42.614,65.121 ccw(c42.614,68.215) 44.802,66.027 46.031,67.256 cw(c47.827,65.46) 47.827,68 L8.4
DO_N: L8.2 R15.1 U7.4 | length 27.9
  Top Layer w0.3: L8.2 51.476,68.8 cw(c51.476,68.38) 51.773,68.677 53.462,68.677 ccw(c53.462,69.438) 54,68.9 U7.4 54.689,68.511 cw(c53.152,66.975) 55.325,66.975 55.325,64.827 ccw(c57.865,64.827) 56.069,63.031 56.427,62.673 ccw(c58.223,64.469) 58.223,61.929 60.277,61.929 cw(c60.277,59.389) 62.073,61.185 67.783,55.475 cw(c65.987,53.679) 68.527,53.679 68.527,53.445 ccw(c69.8,53.445) 68.9,52.545 R15.1
DO_P: L8.1 R16.1 U7.5 | length 26.4
  Top Layer w0.3: L8.1 51.476,68 ccw(c51.476,68.42) 51.773,68.123 53.462,68.123 cw(c53.462,67.362) 54,67.9 U7.5 54.662,67.238 cw(c54.399,66.975) 54.771,66.975 54.771,64.827 ccw(c57.865,64.827) 55.677,62.639 56.035,62.281 ccw(c58.223,64.469) 58.223,61.375 59.818,61.375 cw(c59.818,58.281) 62.006,60.469 67.247,55.228 cw(c65.494,53.475) 67.973,53.475 67.973,53.421 cw(c66.699,53.421) 67.6,52.52 R16.1
DRDY: R11.2 R12.2 R13.2 R14.2 U1.1 | length 37
  Top Layer w0.3: R11.2 R12.2 R13.2 v1(16.9,39.555) R14.2 ; v1(39.975,27.975) 40.875,27.975 42.05,26.8 U1.1
  Bottom Layer w0.3: v1(16.9,39.555) 19.155,37.3 25.95,37.3 35.275,27.975 v1(39.975,27.975)
DRDY1: CN2.10 CN3.9 R11.1 U3.54 | length 99.1
  Top Layer w0.3: R11.1 v1(12.775,53.575) ; U3.54 61.475,50.275 63.725,52.525 v1(63.725,53.55)
  Bottom Layer w0.4: CN3.9 3.41,53.55 73.225,53.55 74.46,52.315 CN2.10
DRDY2: CN2.12 CN3.11 R12.1 U3.53 | length 94.5
  Top Layer w0.3: R12.1 v1(14.375,51.1) ; U3.53 61.975,47.725 v1(65.2,50.95)
  Bottom Layer w0.4: CN3.11 3.41,51.01 73.225,51.01 74.46,49.775 CN2.12
DRDY3: CN2.14 CN3.13 R13.1 U3.52 | length 89.7
  Top Layer w0.3: R13.1 v1(15.975,48.525) ; U3.52 62.475,44.55 v1(66.425,48.5)
  Bottom Layer w0.4: CN3.13 3.41,48.47 73.38,48.47 CN2.14
DRDY4: CN2.16 CN3.15 R14.1 U3.51 | length 83.9
  Top Layer w0.3: R14.1 v1(17.575,45.925) ; U3.51 62.975,43.45 v1(65.45,45.925)
  Bottom Layer w0.4: CN3.15 3.41,45.93 73.38,45.93 CN2.16
FAULT_LED: R6.2 U3.21 | length 26.1
  Top Layer w0.3: v1(57.275,24.375) 58.475,25.575 U3.21 ; v1(72.45,24.4) 75.375,21.475 R6.2@75.375,20.045
  Bottom Layer w0.3: v1(57.275,24.375) v1@72.425,24.375
FORCE+: RTD1.1 SW1.1 U1.8 | length 39.3
  Top Layer w0.4: RTD1.1 37.067,7.3 43.7,7.3 45.2,8.8 45.2,19.025 43.725,20.5 U1.8
  Top Layer w1: SW1.1 30.142,14.225 RTD1.1
FORCE-: RTD1.3 SW1.5 U1.12 | length 54.2
  Top Layer w0.4: U1.12 47.425,19.85 46.825,19.25 46.825,17.475 50.227,14.073 RTD1.3
  Top Layer w1: SW1.5 20.975,15.61 20.975,10.375 25.625,5.725 45.303,5.725 RTD1.3
GND: C1.1 C2.1 C7.1 C8.1 C11.1 C12.1 C13.1 C14.1 C15.1 C16.1 C17.1 C18.1 C19.1 C20.1 C21.1 C22.1 C23.1 C24.1 C25.1 C26.1 C27.1 C28.1 C29.2 CN2.5 CN2.7 CN2.9 CN3.6 CN3.8 CN3.10 D2.1 L2.1 L4.2 LED1.2 LED2.2 M1.X M2.X M3.X M4.X R3.1 SERIAL.5 SERIAL.6 SWD.2 TRIGGER1.2 U1.18 U2.2 U3.12 U3.18 U3.31 U3.47 U3.63 U7.2 | length 7.7
  Top Layer w0.3: U1.18 v1(50.3,23.75) ; v1(56.65,42.85) 56.975,42.525 U3.63 ; U3.18 56.975,30.55 v1(57.275,30.85) ; U3.31 63.475,30.5 v1@63.85,30.875 ; v1(65.025,38.55) U3.47
  other v1: 66.15,2.5 71.15,2.5 68.65,7.5 68.65,17.5 73.65,17.5 56.85,22.125 53.55,22.175 61.15,22.5 71.15,22.5 45.425,24.85 41.1,26.425 43.35,26.5 47.475,26.5 55.375,26.975 65.75,27.025 42.6,27.5 48.65,27.5 53.65,27.5 68.65,27.5 63.775,30.8 1.15,32.5 11.15,32.5 16.15,32.5 21.15,32.5 26.15,32.5 46.15,32.5 56.15,32.5 61.15,32.5 71.15,32.5 51.1,32.9 64.875,35 3.65,37.5 13.65,37.5 28.65,37.5 33.65,37.5 38.65,37.5 48.65,37.5 58.65,37.5 51.25,39.35 62.175,39.55 69.275,39.9 75.375,41.225 1.15,42.5 6.15,42.5 11.15,42.5 31.15,42.5 41.15,42.5 46.15,42.5 51.15,42.5 64.55,42.675 65.85,42.725 54.175,42.925 67.325,45.325 6.15,52.5 11.15,52.5 16.15,52.5 31.15,52.5 36.15,52.5 41.15,52.5 46.15,52.5 51.15,52.5 61.15,52.5 66.15,52.5 10.05,54.625 35.4,54.75 11.075,56.95 13.65,57.5 18.65,57.5 28.65,57.5 33.65,57.5 38.65,57.5 43.65,57.5 48.65,57.5 53.65,57.5 63.65,57.5 68.65,57.5 10.05,57.65 35.4,59.6 68.525,59.65 69.875,59.65 66.825,61.125 35.4,61.175 65.825,65.4 65.825,66.025 57.825,67.125 3.65,67.5 8.65,67.5 13.65,67.5 18.65,67.5 28.65,67.5 68.65,67.5 73.65,67.5 57.35,67.7 55.65,68.4 64.7,68.675 64.75,69.675 1.15,72.5 11.15,72.5 16.15,72.5 21.15,72.5 51.15,72.5 66.15,72.5 8.65,77.5 13.65,77.5 18.65,77.5 53.65,77.5 58.65,77.5 63.65,77.5
GNDA: C3.1 C4.1 C5.1 C6.1 L2.2 SW1.3 U1.13 U1.19 | length 5.2
  Top Layer w0.4: 45.8,21.725 v1(45.8,23.45) 46.75,24.4 U1.19
  other v1: 47.825,1.225 37.075,1.675 26.275,1.8 2.15,3.5 6.15,3.5 10.15,3.5 14.15,3.5 18.15,3.5 54.15,3.5 58.15,3.5 22.85,5.325 4.15,7.5 8.15,7.5 12.15,7.5 16.15,7.5 52.15,7.5 60.15,7.5 2.15,11.5 6.15,11.5 10.15,11.5 18.15,11.5 22.15,11.5 26.15,11.5 30.15,11.5 38.15,11.5 46.15,11.5 54.15,11.5 4.15,15.5 16.15,15.5 28.15,15.5 32.15,15.5 36.15,15.5 40.15,15.5 44.15,15.5 52.15,15.5 56.15,15.5 60.15,15.5 2.15,19.5 10.15,19.5 14.15,19.5 26.15,19.5 30.15,19.5 34.15,19.5 46.15,19.5 58.15,19.5 50.075,20.425 47.775,20.475 4.15,23.5 8.15,23.5 12.15,23.5 16.15,23.5 20.15,23.5 24.15,23.5 28.15,23.5 32.15,23.5 36.15,23.5 44.15,23.5 37.75,23.675 37.125,24.1 29.575,24.35 29.55,25.875 37.225,26.2 37.675,26.475
MISO: CN2.13 CN3.14 U1.17 U3.22 | length 103.9
  Top Layer w0.3: U1.17@48.854,23.096 57.471,23.096 58.975,24.6 U3.22 58.975,31.7 62.075,34.8 62.075,37.475 66.6,42 v1(66.6,47.225)
  Bottom Layer w0.4: CN3.14 CN2.13
MOSI: CN2.15 CN3.16 U1.14 U3.23 | length 104.5
  Top Layer w0.3: U1.14 48.854,21.146 57.896,21.146 59.475,22.725 U3.23 59.475,30.4 60.425,31.35 61.575,31.35 63.075,32.85 63.075,37.65 67.175,41.75 v1(67.175,44.675)
  Bottom Layer w0.4: CN3.16 CN2.15
NetC9_2: C9.2 SW2.3 | length 3.2
  Top Layer w1: SW2.3 C9.2@10.155,21.525
NetC10_2: C10.2 SW2.1 | length 3
  Top Layer w1: SW2.1 C10.2@9.95,14.225
NetC13_2: C13.2 U2.4 | length 1.8
  Top Layer w0.6: C13.2@21.77,66.2 U2.4
NetCN1_1: CN1.1 F1.2 | length 19.3
  Top Layer w1.2: F1.2 31.575,78.35 35.275,74.65 35.275,68.25 36.46,67.065 CN1.1
NetCN1_4: CN1.4 CN1.5 CN1.6 D1.1 L4.1 | length 2.5
  Top Layer w0.8: L4.1 25.675,75.321 D1.1
  other v1: 46.2,65.825 32.15,66.5 35.15,66.5 41.15,66.5 30.65,69.5 33.65,69.5 42.65,69.5 45.65,69.5 38.15,72.5 41.15,72.5 26.45,74 26.125,74.75 27.65,75.5 30.65,75.5 36.65,75.5 39.65,75.5 42.65,75.5 45.65,75.5 35.15,78.5 38.15,78.5 41.15,78.5 44.15,78.5 28.175,80.6 26.5,80.75
NetD1_2: D1.2 F1.1 L3.1 | length 4.4
  Top Layer w0.8: L3.1 24.075,78.2 F1.1
NetLED1_1: LED1.1 R5.1 | length 6.9
  Top Layer w0.3: R5.1@65.6,11.205 65.6,5.53 LED1.1
NetLED2_1: LED2.1 R6.1 | length 15.2
  Top Layer w0.3: LED2.1 72.205,6.23 75.35,9.375 R6.1
NetR1_1: R1.1 U1.6 U1.7 | length 4.1
  Top Layer w0.4: R1.1@39.78,21.15 40.75,21.15 ; U1.7 40.75,21.15 ; U1.6 40.975,21.8 40.75,21.575 40.75,21.15
NetR1_2: R1.2 R2.2 U1.4 U1.5 | length 5.5
  Top Layer w0.4: R2.2 40.705,22.695 ; U1.5 40.95,22.45 40.705,22.695 ; U1.4@42.05,23.071 41.081,23.071 40.705,22.695
NetR3_2: R3.2 U3.60 | length 2.4
  Top Layer w0.3: U3.60 R3.2@58.475,43.745
NetR4_2: R4.2 TRIGGER1.1 | length 9.4
  Top Layer w0.3: TRIGGER1.1 58.775,71.625 61.805,68.595 R4.2
NetSW1_2: SW1.2 U1.9 | length 19.5
  Top Layer w0.4: SW1.2 35.61,18.035 37.425,19.85 U1.9
RTDIN+: R2.1 RTD1.2 SW2.2 U1.10 | length 55
  Top Layer w0.4: RTD1.2 41.972,19.123 U1.10
  Bottom Layer w0.4: v1(37.65,21.125) 39.975,18.8 v1(41.975,18.8)
  Bottom Layer w1: SW2.2 7.265,18.035 18.3,7 38.323,7 RTD1.2
RTDIN-: C9.1 C10.1 RTD1.4 SW1.4 U1.11 | length 83.9
  Top Layer w0.4: U1.11 53.825,19.2 58.482,14.543 RTD1.4
  Top Layer w1: C10.1@11.701,14.206 C10.1@11.72,14.206 ; C9.1 C10.1@11.72,14.206 ; SW1.4 C10.1@11.72,14.206 ; RTD1.4 51.658,3.825 21.45,3.825 11.72,13.555 C10.1@11.72,14.206
RX_ARM: SERIAL.3 U3.17 | length 26.1
  Top Layer w0.3: SERIAL.3 38.975,35.545 38.975,30.925 39.975,29.925 55.796,29.925 U3.17@56.421,29.3
SCLK: CN2.11 CN3.12 U1.15 U3.55 | length 104.5
  Top Layer w0.35: U1.15 v1(51.1,21.8) ; v1(51.1,30.8) 55.8,30.8 60.975,35.975 U3.55 v1(60.975,49.8)
  Bottom Layer w0.35: v1(51.1,21.8) v1(51.1,30.8)
  Bottom Layer w0.4: CN3.12 CN2.11
SWCLK: SWD.4 U3.46 | length 18.7
  Top Layer w0.3: U3.46 65.075,38.05 64.3,37.275 64.3,31.55 65.92,29.93 SWD.4
SWDIO: SWD.3 U3.49 | length 20
  Top Layer w0.3: U3.49 64.275,41.3 v1(64.85,41.875)
  Bottom Layer w0.3: v1@64.825,41.85 72.575,41.85 75.625,38.8 75.625,33.77 SWD.3
TRIGGER: C16.2 D2.2 R4.1 U3.50 | length 51.9
  Top Layer w0.3: D2.2@63.355,65.725 C16.2 ; U3.50 63.475,43.025 v1(63.975,43.525)
  Bottom Layer w0.3: v1(63.375,66.75) 73.65,66.75 75.95,64.45 75.95,44.175 75.3,43.525 v1(63.975,43.525)
TX_ARM: SERIAL.2 U3.16 | length 24.7
  Top Layer w0.3: SERIAL.2 37.19,40.485 40.625,37.05 40.625,31.775 41.2,31.2 47.15,31.2 47.5,31.55 U3.16
VBUS: C11.2 C12.2 L3.2 U2.1 U2.3 | length 8.1
  Top Layer w0.8: U2.3 C11.2@23.575,70.55 ; L3.2 23.725,72.13 C11.2 25.33,70.7 25.529,70.501 U2.1@25.529,68.4
X1: C21.2 U3.5 X1.1 | length 14.5
  Top Layer w0.3: X1.1@43.837,43.024 43.837,40.551 ccw(c46.101,40.551) 44.5,38.95 ccw(c46.151,40.601) 46.151,38.266 C21.2 48.429,38.266 cw(c48.429,36.504) 49.675,37.75 ccw(c51.365,39.44) 51.365,37.05 U3.5
X2: C22.2 U3.6 X1.2 | length 11.9
  Top Layer w0.3: X1.2@43.837,34.21 cw(c46.377,34.21) 44.581,36.006 44.9,36.325 cw(c45.945,35.28) 45.945,36.758 C22.2 ccw(c48.022,37.26) 48.022,36.55 U3.6
pads on no net: SERIAL.1 SW1.6 SW1.7 SW2.7 SWD.5 U1.20 U3.2 U3.3 U3.4 U3.7 U3.8 U3.9 U3.10 U3.11 U3.14 U3.15 U3.24 U3.25 U3.26 U3.27 U3.28 U3.29 U3.30 U3.33 U3.34 U3.35 U3.36 U3.37 U3.38 U3.39 U3.40 U3.41 U3.42 U3.43 U3.61 U3.62 U7.1

## Polygon pours and split planes (outlines as drawn)
NetCN1_4 on Bottom Layer "Top Layer-No Net 1" (solid, pour order 6): 25.275,81.4 25.275,74.175 ccw(c25.925,74.175) 25.925,73.525 27.46,73.525 cw(c27.46,70.985) 30,70.985 30,65.9 ccw(c30.6,65.9) 30.6,65.3 46.325,65.3 ccw(c46.325,65.725) 46.75,65.725 46.75,81.25 cw(c46.8,81.35) 46.7,81.4
GNDA on Bottom Layer "Top Layer-No Net 1" (solid, pour order 2): 46.375,23.95 cw(c46.375,23.675) 46.65,23.675 46.65,21.375 ccw(c47.3,21.375) 47.3,20.725 61.16,20.725 cw(c61.16,18.185) 63.7,18.185 63.7,0.05 ccw(c63.775,0.05) 63.775,-0.025 0.05,-0.025 cw(c0.05,0.025) 0,0.025 0,26.925 cw(c0.025,26.925) 0.025,26.95 39.55,26.95 cw(c39.55,26.4) 40.1,26.4 40.1,24.325 ccw(c40.475,24.325) 40.475,23.95
GND on Bottom Layer "Top Layer-No Net 1" (solid, pour order 8): 0,81.4 76.725,81.4 76.725,-0.003 0.008,-0.003
GND on Top Layer "Top Layer-No Net 1" (solid, remove dead copper, pour order 10): 0,81.4 76.725,81.4 76.725,-0.003 0.008,-0.003
NetCN1_4 on Top Layer "Top Layer-No Net 1" (solid, pour order 4): 25.275,81.4 25.275,74.175 ccw(c25.925,74.175) 25.925,73.525 27.46,73.525 cw(c27.46,70.985) 30,70.985 30,65.9 ccw(c30.6,65.9) 30.6,65.3 46.325,65.3 ccw(c46.325,65.725) 46.75,65.725 46.75,81.25 cw(c46.8,81.35) 46.7,81.4
GNDA on Top Layer "Top Layer-No Net 1" (solid, pour order 0): 46.375,23.95 cw(c46.375,23.675) 46.65,23.675 46.65,21.375 ccw(c47.3,21.375) 47.3,20.725 61.16,20.725 cw(c61.16,18.185) 63.7,18.185 63.7,0.05 ccw(c63.775,0.05) 63.775,-0.025 0.05,-0.025 cw(c0.05,0.025) 0,0.025 0,26.925 cw(c0.025,26.925) 0.025,26.95 39.55,26.95 cw(c39.55,26.4) 40.1,26.4 40.1,24.325 ccw(c40.475,24.325) 40.475,23.95

## Keep-outs
Keep-Out Layer:
  lines w0.1: 0.025,0 0.025,81.4 76.725,81.4 76.725,0 0.025,0

## Silkscreen, mask and mechanical layers (free items; w line width, h text height)
Top Overlay:
  drawing of 857 lines, arcs and shapes, not listed
  text "TRIGGER ME" at 53.55,70.425 h2 r90
  text "CHANNEL SELECTION" at 11.025,44.65 h1.8
  text "DRDY" at 11.125,36.1 h2.5
  text "CS" at 19.425,36.1 h2.5
  text "S/N:" at 0.875,36 h2
  text "R SELECT" at 0.625,23.425 h2
  text "3W/4W SELECT" at 14.5,23.425 h2
  text "RTD INPUT" at 28.575,13.05 h2
  text "TRIG" at 65.3,6.725 h2
  text "FAULT" at 70.725,6.725 h2
Top Solder:
  text "NAVARRO ELETRÔNICA / USB-RTD ADAPTER V1.0 / ENG. FELIPE NAVARRO" at 28.075,49.675 h2.5
BOARD OUTLINE:
  lines w0.1: 0,0 0,26.312 0,81.4 76.725,81.4 76.725,39.368 76.725,0 0,0

## Text inside footprints (layer, text, board x,y; h text height)
CN2: Top Overlay "16" at 74.06,43.28 h1.6 r270; Top Overlay "15" at 71.52,43.28 h1.6 r270; Top Overlay "1" at 71.551,64.688 h1.6 r270; Top Overlay "2" at 74.091,64.688 h1.6 r270
CN3: Top Overlay "16" at 4.16,43.28 h1.6 r270; Top Overlay "15" at 1.62,43.28 h1.6 r270; Top Overlay "1" at 1.651,64.688 h1.6 r270; Top Overlay "2" at 4.191,64.688 h1.6 r270
SERIAL: Top Overlay "1" at 37.05,44.55 h1.5 r90
SWD: Top Overlay "1" at 74.75,39.125 h1.5 r90